# Altium PCB PCB.PcbDoc
Units mm, origin at the board's own origin, x right, y up, seen from the top; angles counter-clockwise.
Board outline 101.47 x 42.04 mm, 2 copper layers (Top Layer, Bottom Layer); 23 components, 23 nets, 90 pads, 6 vias.
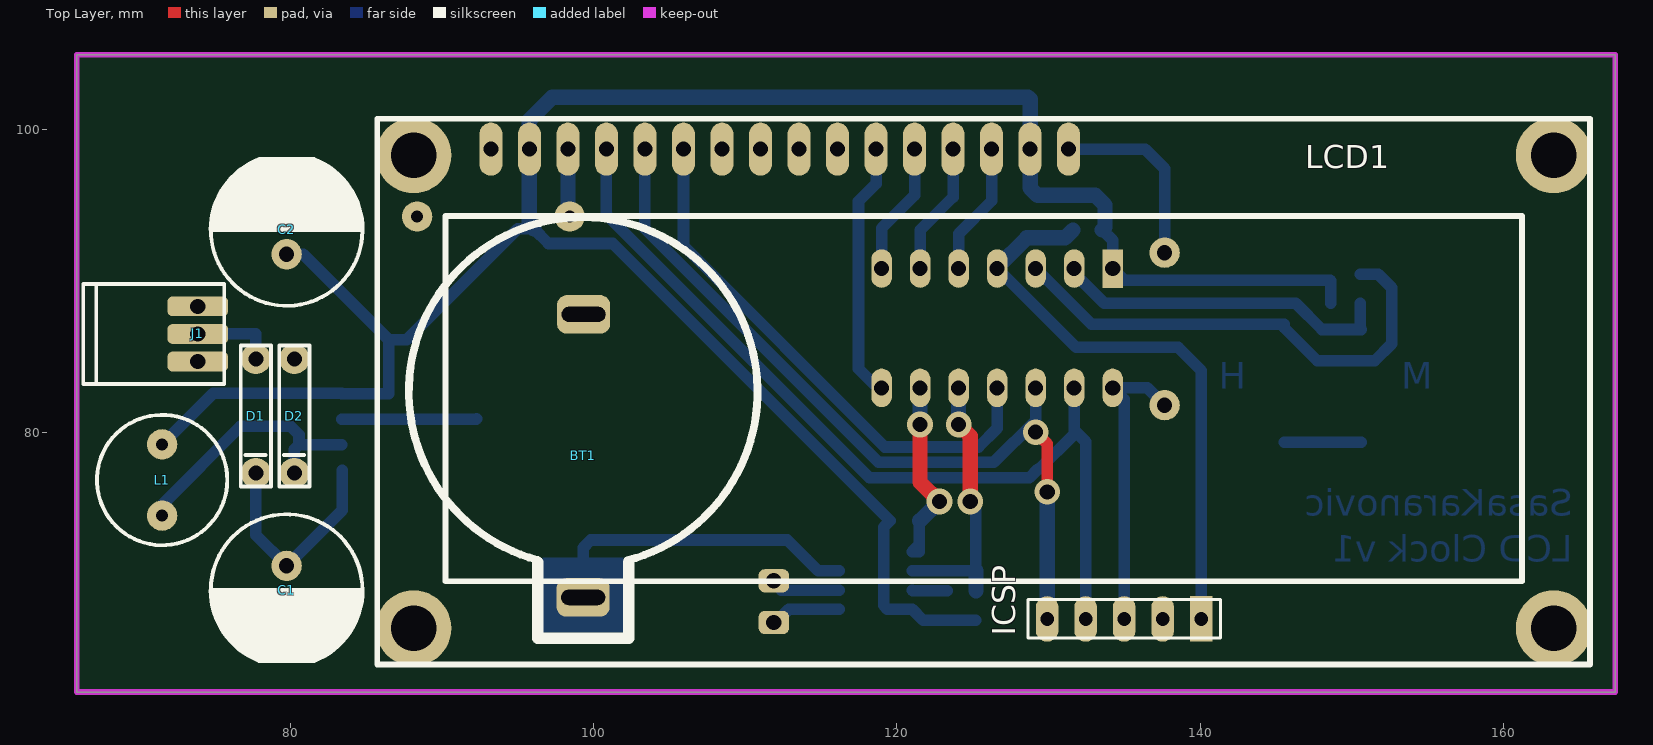
[diagram p0: Top Layer view]
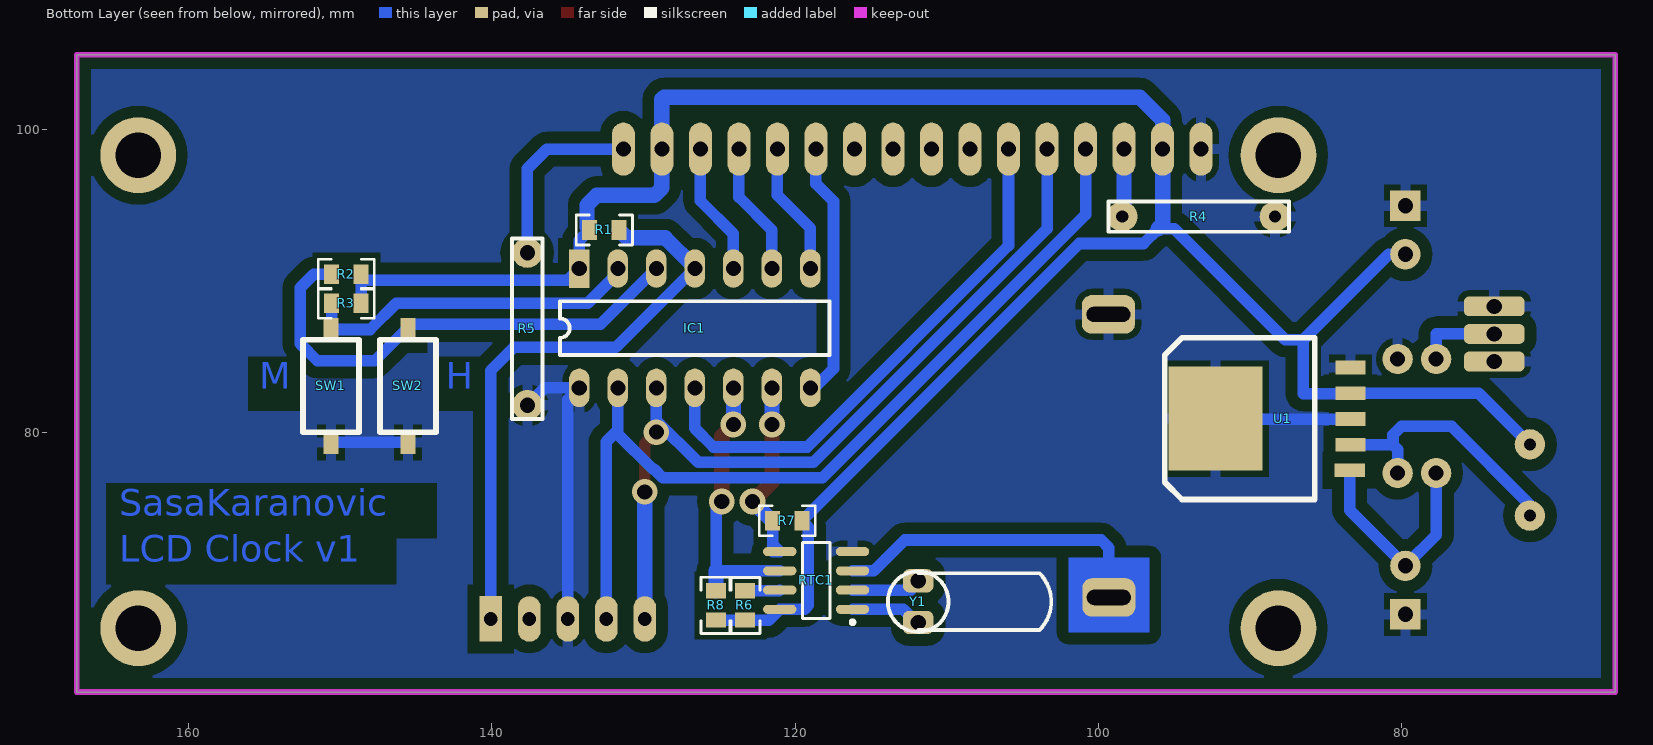
[diagram p1: Bottom Layer view, seen from below]
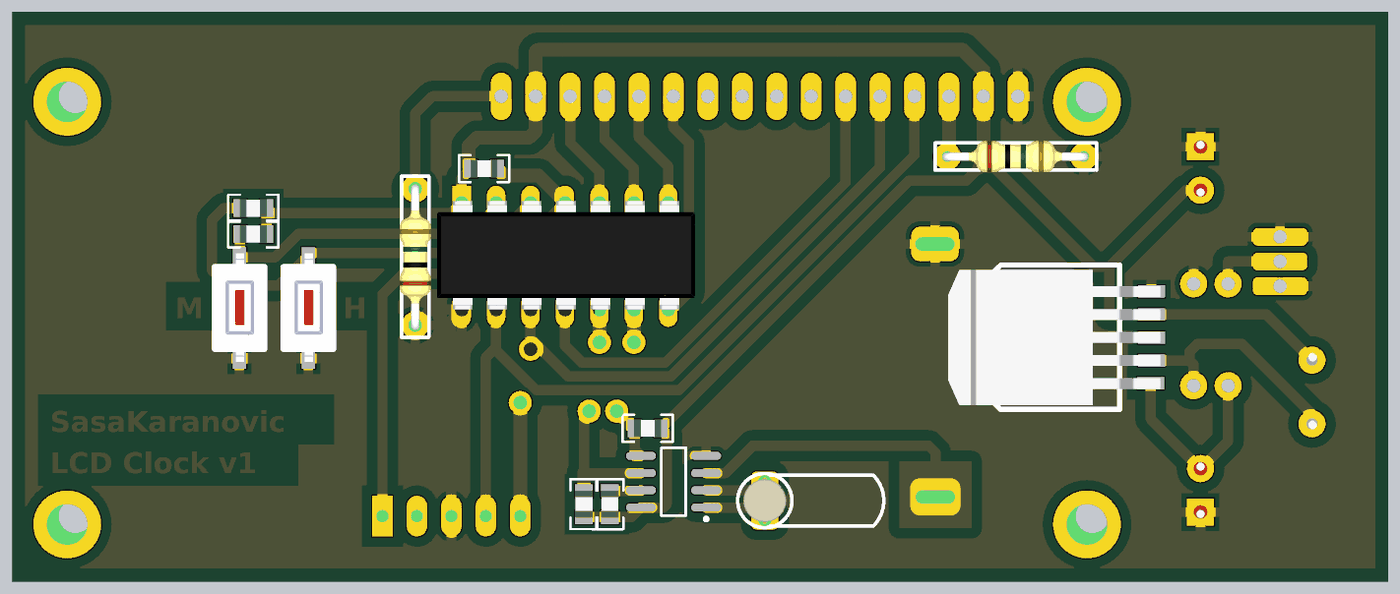
[diagram p2: 3D render of the assembled board from below, using the file's embedded part models]

## Layer stack, top to bottom
Top Layer: signal copper 0.0356
Dielectric: dielectric 0.32, FR-4, Dk 4.8
Bottom Layer: signal copper 0.0356

## Board outline
65.913,62.865 65.913,104.902 167.386,104.902 167.386,62.865

## Design rules (kind name [scope] priority, off if disabled: settings)
AssemblyTestPointUsage [All] p1 off:
AssemblyTestpoint [All] p1 off: testpointundercomponent=TRUE minsize=1.016 maxsize=2.54 preferedsize=1.524 minholesize=0 maxholesize=1.016 preferedholesize=0.813 testpointgrid=0.025 usegrid=TRUE gridtolerance=0 allowsidetop=TRUE allowsidebottom=TRUE
Clearance "Poly Clearance" [IsRegion] p1: gap=0.762
Clearance [All] p2: gap=0.254
ComponentClearance [All] p1 off: gap=0.254 collisioncheckmode=3 verticalgap=0.254 showdistances=FALSE
FabricationTestPointUsage [All] p1 off: valid=0 allowmultiple=FALSE
FabricationTestpoint [All] p1 off: side=3 testpointundercomponent=TRUE minsize=1.016 maxsize=2.54 preferedsize=1.524 minholesize=0 maxholesize=1.016 preferedholesize=0.813 testpointgrid=0.025 allowsidetop=TRUE allowsidebottom=TRUE usegrid=TRUE gridtolerance=0
FanoutControl Fanout_BGA [IsBGA] p1 off: bgadir=Out bgaviamode=Centered fanoutstyle=Auto fanoutdirection=Alternating viagrid=0.025 // Fanout_BGA (Default Rule)
FanoutControl Fanout_LCC [IsLCC] p2 off: bgadir=Out bgaviamode=Centered fanoutstyle=Auto fanoutdirection=Alternating viagrid=0.025 // Fanout_LCC (Default Rule)
FanoutControl Fanout_SOIC [IsSOIC] p3 off: bgadir=Out bgaviamode=Centered fanoutstyle=Auto fanoutdirection=Alternating viagrid=0.025 // Fanout_SOIC (Default Rule)
FanoutControl Fanout_Small [(CompPinCount < 5)] p4 off: bgadir=Out bgaviamode=Centered fanoutstyle=Auto fanoutdirection=OutThenIn viagrid=0.025 // Fanout_Small (Default Rule)
FanoutControl Fanout_Default [All] p5 off: bgadir=Out bgaviamode=Centered fanoutstyle=Auto fanoutdirection=Alternating viagrid=0.025 // Fanout_Default (Default Rule)
HoleSize [All] p1: absolutevalues=TRUE maxlimit=10 minlimit=0.6 maxpercent=80.000 minpercent=20.000
MinimumSolderMaskSliver [All] p1 off: minsoldermaskwidth=0.254
NetAntennae [All] p1 off: netantennaetolerance=0
PasteMaskExpansion [All] p1 off: expansion=0
PlaneClearance [All] p1 off: clearance=0.508
PlaneConnect [All] p1 off: planeconnectstyle=Relief reliefexpansion=0.508 reliefentries=4 reliefconductorwidth=0.254 reliefairgap=1.5
PolygonConnect [All] p1: connectstyle=Relief reliefconductorwidth=0.7 reliefentries=4 polygonreliefangle="90 Angle" airgapwidth=0.4
RoutingVias [All] p1: holewidth=0.9 width=1.35 viastyle="Through Hole" minholewidth=0.9 minwidth=0.9 maxholewidth=10 maxwidth=10
SilkToSilkClearance [All] p1 off: silktosilkclearance=0.254
SilkToSolderMaskClearance [IsPad] p1 off: minsilkscreentomaskgap=0.254 clearancetoexposedcopper=TRUE
SolderMaskExpansion [All] p1 off: expansion=0.102
Width [All] p1: maxlimit=1.27 minlimit=0.508 preferedwidth=0.889
10 further rules are at their usual default settings.

## Components (designator, comment, footprint, x,y, rotation, side; value= is the part's Value field where it differs from the comment)
BT1 "Battery" "CR2032 Holder" 99.314,82.677 r180 top
C1 "100uF / 50V" "Electrolytic Cap2" 79.756,69.596 r270 top
C2 "1000uF / 16V" "Electrolytic Cap2" 79.756,93.345 r90 top
D1 "Diode" "Axial 0.3 - Polarized" 77.724,84.836 r270 top
D2 "1N5822" "Axial 0.3 - Polarized" 80.264,84.836 r270 top
IC1 "PIC16F1825" DIP14-300MIL 134.239,90.805 r270 bottom
ICSP "Header 5" HDR1X5 140.081,67.691 r180 top
J1 "Jack Mini Inline" "Jack Mini Inline" 70.993,86.487 r90 top
L1 "Inductor" CW8A 71.541,76.854 r90 top
LCD1 "16x2" HD44780 125.73,82.677 r0 top locked (schematic designator LDC1)
R1 "Res" 0805 132.588,93.345 r0 bottom
R2 "Res" 0805 149.606,90.424 r180 bottom
R3 "Res" 0805 149.606,88.519 r180 bottom
R4 "Res" "Axial 0.4"#1 98.425,94.234 r180 bottom
R5 "Res" "Axial 0.4"#2 137.668,81.788 r90 bottom
R6 "Res" 0805 123.317,68.58 r90 bottom
R7 "Res" 0805 120.523,74.168 r180 bottom
R8 "Res" 0805 125.222,68.58 r270 bottom
RTC1 "DS1307Z" SOIC8N_N 118.618,70.231 r0 bottom
SW1 "Switch" "SMD SWITCH 2PIN" 150.622,83.058 r90 bottom
SW2 "Switch" "SMD SWITCH 2PIN" 145.542,83.058 r90 bottom
U1 "LM2576-5" TO263-5 90.678,80.899 r90 bottom
Y1 "XTAL" XTAL-Watch 111.887,68.834 r90 bottom

## Footprints (in the part's own frame and the unit in brackets; to place one, negate y for a bottom-side part, rotate by r counter-clockwise, add the part's x,y. Pads: shape width x height; smd on the part's side, far side on the other; paste and mask are expansions set on the pad)
0805 [mm]
  rect 1x1.3 smd: 1(-0.97,0) 2(0.97,0)
  silkscreen extent -1.85,-0.99 1.85,0.99, body extent -1,-0.65 1,0.66, height 0.73
"Axial 0.3 - Polarized" [mm] "Razmak 3x 2.54"
  round 2 hole 1: A(0,0) K(7.52,0)
  silkscreen extent -0.9,-1 8.4,1
"Axial 0.4"#1 [mm] "Razmak 4x 2.54"
  round 2 hole 0.8: 1(0,0) 2(10.06,0)
  silkscreen extent -0.9,-1 11,1, body extent -0.36,-1.16 10.4,1.15, height 2.63
"Axial 0.4"#2 [mm] "Razmak 4x 2.54"
  round 2 hole 1: 1(0,0) 2(10.06,0)
  silkscreen extent -0.9,-1 11,1, body extent -0.36,-1.16 10.4,1.15, height 2.63
"CR2032 Holder" [mm] "Plastic Trough Hole CR2032 Holder"
  rrect50% 3.5x2.54 hole 1 slot 2.9 at 0 deg: 1(0,13.57) 2(-0.025,-5.1)
  silkscreen extent -11.5,-11.5 11.5,16.25
CW8A [mm] "CW8A inductor footprint"
  round 2 hole 0.8: 1(-2.35,0) 2(2.35,0)
  silkscreen extent -4.3,-4.3 4.3,4.3, body extent -4.07,-4.1 4.23,4.2, height 11.2
DIP14-300MIL [mm]
  rect 2.54x1.35 hole 1: 1(0,0)
  oval 2.54x1.35 hole 1: 2(0,2.54) 3(0,5.08) 4(0,7.62) 5(0,10.16) 6(0,12.7) 7(0,15.24) 8(7.874,15.24) 9(7.874,12.7) 10(7.874,10.16) 11(7.874,7.62) 12(7.874,5.08) 13(7.874,2.54) 14(7.874,0)
  silkscreen extent 2.16,-1.27 5.72,16.51, body extent -0.15,-1.82 7.85,17.23, height 9.47
"Electrolytic Cap2" [mm] "Elektrolitski kondenzator, razmak 3.2mm 470uF"
  round 2 hole 1: 1(-1.6,0)
  rect 2x2 hole 1: 2(1.6,0)
  silkscreen extent -5,-5.13 4.79,5.13, body extent -4,-4 4,4, height 12.2
HD44780 [mm] "HD44780 16x2 LCD display"
  oval 1.524x3.5 hole 1: A(3.06,16) BRTN(-27.42,16) D0(-17.26,16) D1(-14.72,16) D2(-12.18,16) D3(-9.64,16) D4(-7.1,16) D5(-4.56,16) D6(-2.02,16) D7(0.52,16) E(-19.8,16) K(5.6,16) RS(-24.88,16) RW(-22.34,16) VDD(-29.96,16) VSS(-32.5,16)
  round 5 hole 3: ""(-37.6,-15.6) ""(-37.6,15.6) ""(37.6,-15.6) ""(37.6,15.6)
  silkscreen extent -40,-18 40,18, body extent -40.5,-17.5 39.5,18.5, height 21
HDR1X5 [mm] "Connector; Header; 5 Position"
  rect 1.5x3 hole 0.9: 1(0,0)
  oval 1.5x3 hole 0.9: 2(2.54,0) 3(5.08,0) 4(7.62,0) 5(10.16,0)
  silkscreen extent -1.27,-1.27 11.43,1.27
"Jack Mini Inline" [mm] "3pin Mini Jack with inline pins"
  rrect50% 1.3x4 hole 1: 1(-1.82,-2.9) 2(0,-2.9) 3(1.82,-2.9)
  silkscreen extent -3.3,-4.65 3.3,4.65
"SMD SWITCH 2PIN" [mm] "SMD 2 pin switch"
  rect 1.524x1 smd: 1(-3.725,0) 2(3.725,0)
  silkscreen extent -3.05,-1.85 3.05,1.85, body extent -3.97,-1.82 4.03,1.78, height 2.4
SOIC8N_N [mm] "SOIC, 8-Leads, Body 4.9x3.9mm, Pitch 1.27mm, IPC Medium Density"
  oval 2.2x0.6 smd: 1(-2.4,1.905) 2(-2.4,0.635) 3(-2.4,-0.635) 4(-2.4,-1.905) 5(2.4,-1.905) 6(2.4,-0.635) 7(2.4,0.635) 8(2.4,1.905)
  silkscreen extent -2.52,-2.5 0.9,2.88, body extent -1.95,-2.45 1.95,2.45, height 1.75
TO263-5 [mm] "TO263-5 SMT package"
  rect 0.9x2 smd: 1(-3.4,-7.25) 2(-1.725,-7.3) 3(-0.025,-7.3) 4(1.675,-7.3) 5(3.375,-7.3)
  rect 6.86x6.22 smd: 3(0,1.6)
  silkscreen extent -5.34,-4.95 5.34,4.95, body extent -5.02,-7.96 4.98,7.71, height 4.78
XTAL-Watch [mm] "32768KHz Watch Crystal Footprint"
  rrect50% 1.524x2 hole 1: 1(-1.375,0) 2(1.375,0)
  silkscreen extent -2,-8.77 2,2, body extent -1.72,-1.6 1.73,1.6, height 8.27

## Part data
BT1: "Multicell Battery"
C1 C2: library part "Cap Electrolytic", "Polarized Capacitor (Axial)"
D2: library part "Diode Schotky"
ICSP: "Header, 5-Pin"
LCD1: library part HD44780, "HD44780 16x2 LCD Display"
R1 R2 R3 R4 R5 R6 R7 R8: "Resistor"
RTC1: "64 X 8 Serial Real-Time Clock"
U1: library part LM257-xx
Y1: "Crystal Oscillator"

## Via types
v1: diameter 1.7, hole 1, Top Layer to Bottom Layer, 6 vias

## Nets (pads, with @x,y where several pads share a name; then routed paths per layer and width w, separated by ;. In a path a pad name is that pad's centre, name@x,y a point inside that pad or via, vN(x,y) a via of type N, cw(c..) or ccw(c..) an arc to the next point about the centre after c; other vN are vias at no path point)
1STIME: R6.2 RTC1.7 | length 2.3
  Bottom Layer w0.762: RTC1.7 121.064,69.55 R6.2
D4: IC1.8 LCD1.D4 | length 17
  Bottom Layer w0.762: LCD1.D4 118.63,96.405 117.475,95.25 117.475,84.201 118.745,82.931 IC1.8
D5: IC1.7 LCD1.D5 | length 8.8
  Bottom Layer w0.762: IC1.7 118.999,93.472 121.17,95.643 LCD1.D5
D6: IC1.6 LCD1.D6 | length 8.8
  Bottom Layer w0.762: IC1.6 121.539,93.345 123.71,95.516 LCD1.D6
D7: IC1.5 LCD1.D7 | length 8.8
  Bottom Layer w0.762: IC1.5 124.079,93.091 126.25,95.262 LCD1.D7
E: IC1.11 LCD1.E | length 35.7
  Bottom Layer w0.762: LCD1.E 105.93,92.317 119.214,79.033 125.388,79.033 126.619,80.264 IC1.11
GND: BT1.2 C1.2 C2.2 D2.A IC1.14 ICSP.3 J1.1 J1.3 LCD1.VSS R4.2 R5.1 RTC1.4 SW1.1 SW2.1 U1.3 U1.5 | length 33.4
  Bottom Layer w0.762: U1.3@83.378,80.874 92.253,80.874 U1.3@92.278,80.899 ; ICSP.3 135.001,74.041 135.001,82.169 IC1.14 136.525,82.931 R5.1 ; SW2.1 SW1.1
HR: IC1.3 R2.1 SW2.2 | length 32.5
  Bottom Layer w0.762: IC1.3 132.842,87.122 SW2.2@145.542,87.122 ; SW2.2@145.542,86.91 147.743,84.709 151.511,84.709 152.654,85.852 152.654,89.535 151.765,90.424 R2.1
MIN: IC1.2 R3.1 SW1.2 | length 22.5
  Bottom Layer w0.762: IC1.2 131.699,90.502 133.682,88.519 146.304,88.519 148.04,86.783 SW1.2 150.576,86.829 R3.1
NetBT1_1: BT1.1 RTC1.3 | length 21.2
  Bottom Layer w0.762: BT1.1 99.314,72.39 99.822,72.898 112.776,72.898 114.046,71.628 114.808,70.866 RTC1.3
NetC1_1: C1.1 D1.K U1.1 | length 14.8
  Bottom Layer w0.762: D1.K 77.724,73.228 C1.1 83.428,74.868 U1.1
NetD2_K: D2.K L1.1 U1.2 | length 17.6
  Bottom Layer w0.762: L1.1 71.541,75.224 76.708,80.391 80.01,80.391 80.571,79.83 80.571,79.174 ; D2.K 80.264,78.867 80.571,79.174 ; U1.2 80.571,79.174
NetLDC1_BRTN: LCD1.BRTN R4.1 | length 4.5
  Bottom Layer w1.016: LCD1.BRTN 98.31,94.349 R4.1
NetLDC1_K: LCD1.K R5.2 | length 12.4
  Bottom Layer w0.762: LCD1.K 136.386,98.677 137.668,97.395 R5.2
NetRTC1_1: RTC1.1 Y1.1 | length 4.7
  Bottom Layer w0.762: Y1.1@111.887,67.332 112.881,68.326 RTC1.1
NetRTC1_2: RTC1.2 Y1.2 | length 4.5
  Bottom Layer w0.762: Y1.2@111.887,70.082 112.373,69.596 RTC1.2
RS: IC1.13 ICSP.4 LCD1.RS | length 62.2
  Bottom Layer w0.762: LCD1.RS 100.85,94.349 118.198,77.001 128.749,77.001 129.306,77.558 129.374,77.558 131.699,79.883 IC1.13 131.699,80.137 132.461,79.375 ICSP.4
RST: IC1.4 ICSP.1 R1.1 | length 38.7
  Bottom Layer w0.762: IC1.4 131.826,85.598 138.557,85.598 140.081,84.074 ICSP.1
  Bottom Layer w1: IC1.4 126.619,90.881 128.567,92.829 131.102,92.829 R1.1
RW: IC1.12 ICSP.5 LCD1.RW | length 54.1
  Top Layer w0.762: v1(129.159,80.01) 129.921,79.248 v1(129.921,76.073)
  Bottom Layer w0.762: LCD1.RW 103.39,93.42 118.793,78.017 126.404,78.017 v1@129.159,80.772 ; v1(129.159,80.01) v1@129.159,80.772 ; IC1.12 v1@129.159,80.772
  Bottom Layer w1.016: ICSP.5 v1(129.921,76.073)
SCL: IC1.10 R8.1 RTC1.6 | length 18.1
  Top Layer w1: v1(124.079,80.518) 124.841,79.756 v1(124.841,75.438)
  Bottom Layer w0.762: RTC1.6 125.222,70.866 125.222,75.057 v1(124.841,75.438)
  Bottom Layer w1: v1(124.079,80.518) IC1.10 ; R8.1 125.222,70.866
SDA: IC1.9 R7.1 RTC1.5 | length 13
  Top Layer w1: v1(121.539,80.518) 121.539,76.708 v1(122.809,75.438)
  Bottom Layer w0.762: R7.1 121.493,72.487 ; 121.493,72.487 121.369,72.487 RTC1.5 121.493,72.136 121.493,72.487
  Bottom Layer w1: R7.1 121.539,74.168 v1(122.809,75.438) ; v1(121.539,80.518) IC1.9
VCC: C2.1 IC1.1 L1.2 LCD1.A LCD1.VDD R1.2 R2.2 R3.2 R6.1 R7.2 R8.2 RTC1.8 U1.4 | length 158.3
  Bottom Layer w0.762: L1.2 74.911,82.574 U1.4 83.402,82.55 86.487,82.55 86.487,86.106 ; C2.1 80.848,91.745 86.487,86.106 ; R8.2 R6.1 121.734,67.61 RTC1.8 119.38,68.326 119.126,68.58 119.126,73.741 R7.2 101.265,92.456 97.028,92.456 96.058,93.426 94.996,93.426 87.676,86.106 86.487,86.106 ; R1.2 134.239,92.664 IC1.1 135.001,90.043 148.59,90.043 148.636,89.997 R3.2
  Bottom Layer w1.016: 96.058,93.426 95.77,93.714 LCD1.VDD 95.77,100.596 97.282,102.108 128.651,102.108 128.79,101.969 LCD1.A 128.79,96.127 129.286,95.631 133.096,95.631 133.731,94.996 133.731,93.518 R1.2
VIN+: D1.A J1.2 | length 5.5
  Bottom Layer w0.762: J1.2 77.724,86.487 D1.A
pads on no net: ICSP.2 LCD1. LCD1.D0 LCD1.D1 LCD1.D2 LCD1.D3

## Polygon pours and split planes (outlines as drawn)
GND on Bottom Layer "Top Layer-No Net" (solid, pour order 2): 65.913,104.902 65.913,62.865 167.386,62.865 167.386,104.902 65.913,104.902

## Keep-outs
Keep-Out Layer:
  the board outline again, w0.381

## Other copper
Bottom Layer:
  rectangle net NetBT1_1: 96.647,66.802 101.981,71.755
  text "H" at 141.224,82.296 h3
  text "M" at 153.289,82.296 h3
  text "SasaKaranovic" at 164.592,73.914 h3
  text "LCD Clock v1" at 164.592,70.866 h3